# EAGLE board schematic (EAGLE 9.6.2)
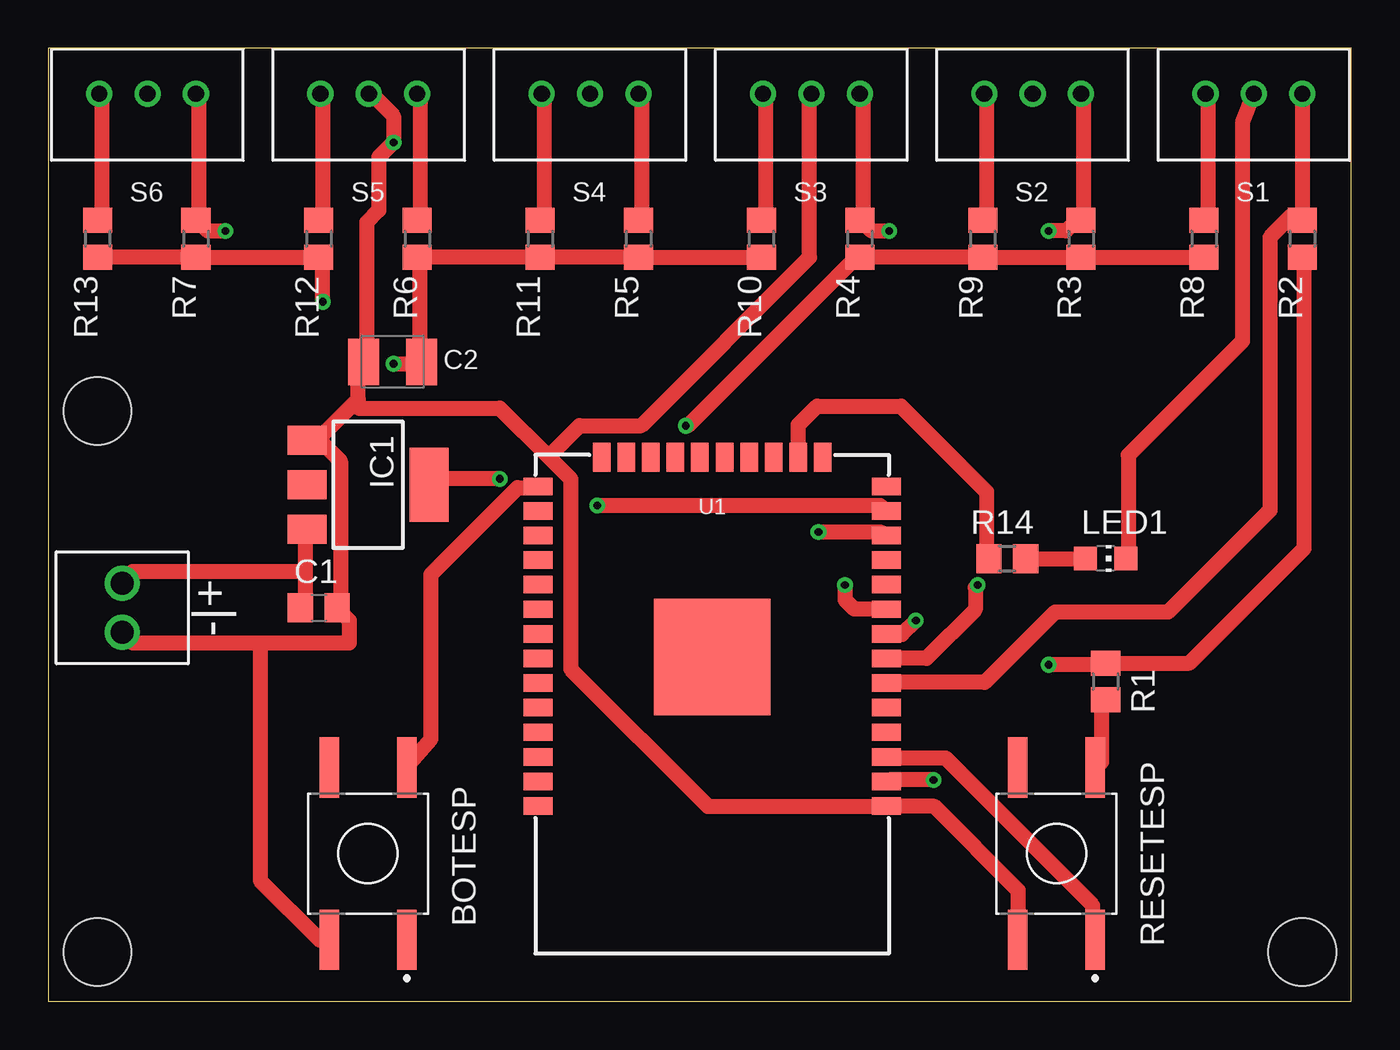
[diagram p0: board, top side]
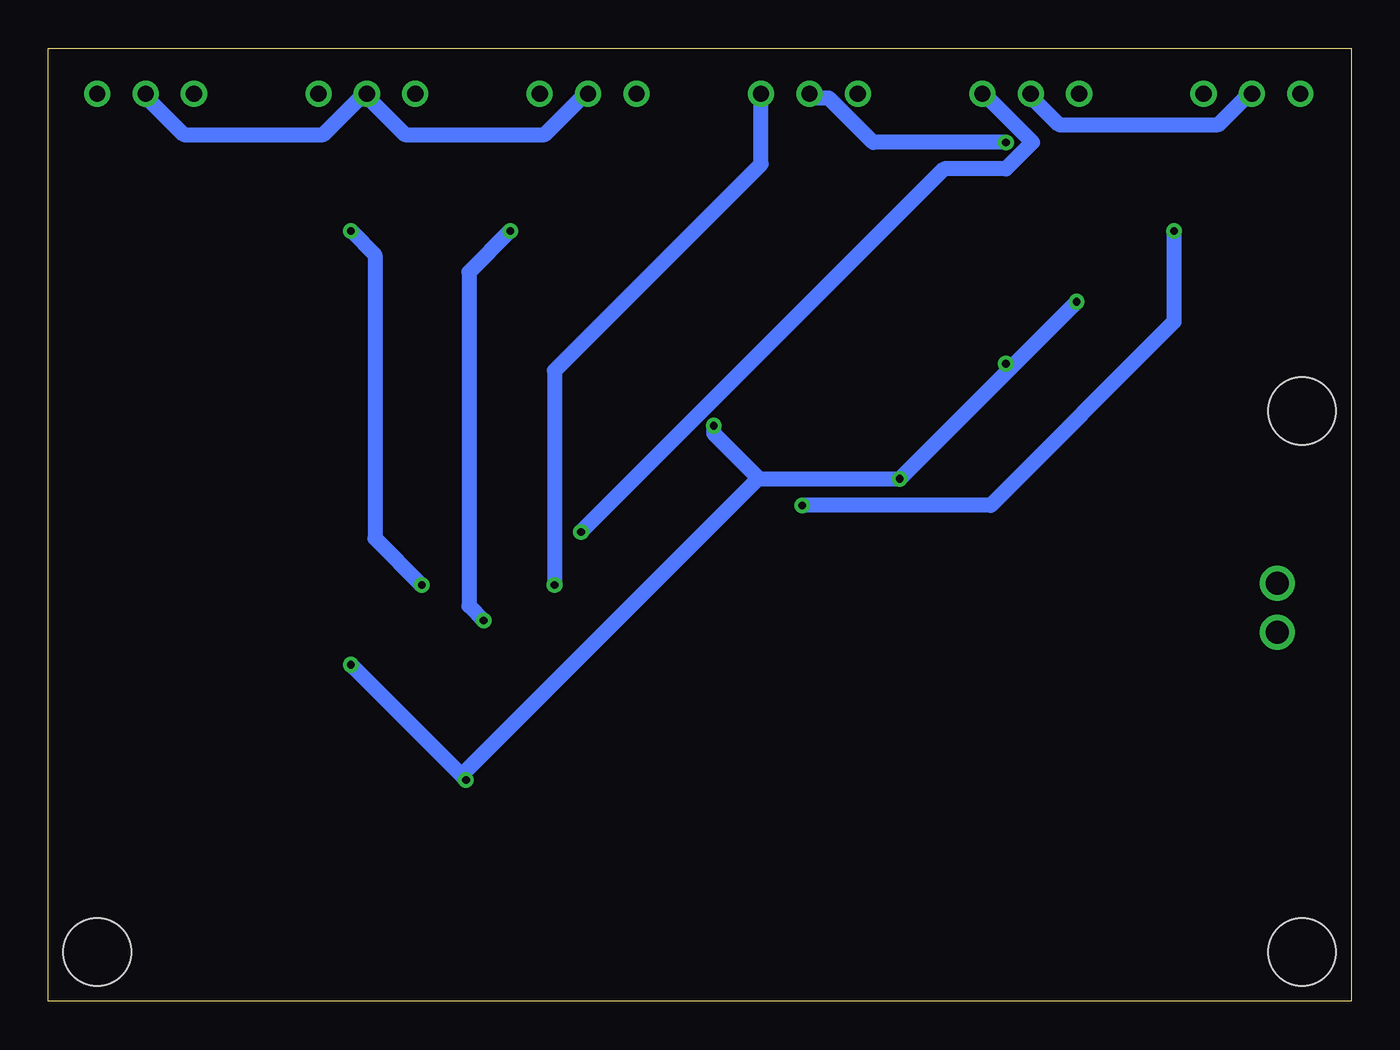
[diagram p1: board, bottom side, seen from below]

Size 67.29 x 49.2 mm. Coordinates in mm from the lower left corner, seen from the top.
Outline: 0,0 67.29,0 67.29,49.2 0,49.2 0,0
Copper layers (1*16): Top 0.035mm / dielectric 1.5mm / Bottom 0.035mm
Design rules "default *": minimum track width 30mil, minimum drill 0.4mm, track to track 6mil, track to pad 6mil, pad to pad 6mil, via to via 6mil, smd to smd 6mil, copper to edge 40mil, drill to drill 6mil, minimum pad ring 10mil, minimum via ring 8mil, stop-mask expansion 4mil, vias tented up to drill 0mil, thermal gap 10mil
Holes 3.5 mm at 2.54,2.54 64.77,2.54 2.54,30.48

## Footprints (pad centres in the part's own frame; a part is rotated, then mirrored left to right if it is on the bottom)
TERMBLK_254-2N = drill 1.2: 1 0,0; 2 2.54,0
KSC441GDCT70SHLFS = smd 3.1 x 1: 1 4.45,2; 2 -4.45,2; 3 4.45,-2; 4 -4.45,-2
C0805 = smd 1.3 x 1.5: 1 -0.95,0; 2 0.95,0
SMC_B = smd 1.6 x 2.4: + -1.5,0; - 1.5,0
SOT223 = smd 1.5 x 2: 1 -2.3,-3.15; 2 0,-3.15; 3 2.3,-3.15 | smd 3.8 x 2: 4 0,3.15
CHIP-LED0805 = smd 1.2 x 1.2: A 0,-1.05; C 0,1.05
R0805 = smd 1.3 x 1.5: 1 -0.95,0; 2 0.95,0
B3B-XH-A = drill 0.84: 1 0,0; 2 2.5,0; 3 5,0
ESP-WROOM-32 = smd 0.9 x 1.5: 1 7.7,9; 2 6.43,9; 3 5.16,9; 4 3.89,9; 5 2.62,9; 6 1.35,9; 7 0.08,9; 8 -1.19,9; 9 -2.46,9; 10 -3.73,9; 11 -5,9; 12 -6.27,9; 13 -7.54,9; 14 -8.81,9; 25 -8.81,-9; 26 -7.54,-9; 27 -6.27,-9; 28 -5,-9; 29 -3.73,-9; 30 -2.46,-9; 31 -1.19,-9; 32 0.08,-9; 33 1.35,-9; 34 2.62,-9; 35 3.89,-9; 36 5.16,-9; 37 6.43,-9; 38 7.7,-9 | smd 1.5 x 0.9: 15 -10.3,5.715; 16 -10.3,4.445; 17 -10.3,3.175; 18 -10.3,1.905; 19 -10.3,0.635; 20 -10.3,-0.635; 21 -10.3,-1.905; 22 -10.3,-3.175; 23 -10.3,-4.445; 24 -10.3,-5.715 | smd 6 x 6: GND 0,0

## Placement (x,y rotation side)
-|+  TERM-BLK-2P  [TERMBLK_254-2N]  3.81,19.05 90 top
BOTESP  KSC441GDCT70SHLFS  [KSC441GDCT70SHLFS]  16.51,7.62 270 top
C1  10uF  [C0805]  13.97,20.32 0 top
C2  22uF  [SMC_B]  17.78,33.02 180 top
IC1  LD117AS33TR  [SOT223]  16.51,26.67 270 top
LED1  [CHIP-LED0805]  54.61,22.86 270 top
R1  10K  [R0805]  54.61,16.51 270 top
R2  1k  [R0805]  64.77,39.37 270 top
R3  1k  [R0805]  53.34,39.37 270 top
R4  1k  [R0805]  41.91,39.37 270 top
R5  1k  [R0805]  30.48,39.37 270 top
R6  1k  [R0805]  19.05,39.37 270 top
R7  1k  [R0805]  7.62,39.37 270 top
R8  220  [R0805]  59.69,39.37 270 top
R9  220  [R0805]  48.26,39.37 270 top
R10  220  [R0805]  36.83,39.37 270 top
R11  220  [R0805]  25.4,39.37 270 top
R12  220  [R0805]  13.97,39.37 270 top
R13  220  [R0805]  2.54,39.37 270 top
R14  220  [R0805]  49.53,22.86 0 top
RESETESP  KSC441GDCT70SHLFS  [KSC441GDCT70SHLFS]  52.07,7.62 270 top
S1  JST-XH-3PIN  [B3B-XH-A]  64.77,46.86 180 top
S2  JST-XH-3PIN  [B3B-XH-A]  53.34,46.86 180 top
S3  JST-XH-3PIN  [B3B-XH-A]  41.91,46.86 180 top
S4  JST-XH-3PIN  [B3B-XH-A]  30.48,46.86 180 top
S5  JST-XH-3PIN  [B3B-XH-A]  19.05,46.86 180 top
S6  JST-XH-3PIN  [B3B-XH-A]  7.62,46.86 180 top
U1  ESP-WROOM-32  [ESP-WROOM-32]  34.29,17.78 270 top

## Library data of the parts
-|+ = Connector; CATEGORY: Fixed Terminal Blocks; DESCRIPTION: Fixed Terminal Blocks 2P SIDE ENTRY 2.54mm; MANUFACTURER: TE Connectivity AMP Connectors; MPN: 282834-2; OPERATING_TEMPERATURE: -40°C ~ 105°C; PART_STATUS: Active; PITCH: 0.100" (2.54mm); ROHS_COMPLIANCE: RoHS Compliant; SERIES: Buchanan; SUBCATEGORY: Terminal Blocks; TYPE: Through Hole; Screw - Rising Cage Clamp; Side wire entry, Horizontal with Board
BOTESP RESETESP = Switch; CREATED_BY: PCBLayout.com; DIGIKEY_PARTNO: CKN12187TR-ND; MANUFACTURER: C&K; MPN: KSC441G DCT 70SH LFS
C1 C2 = rcl; SPICEPREFIX: C
IC1 = v-reg
LED1 = led
R1-R14 = rcl; SPICEPREFIX: R
S1-S6 = Connector; CATEGORY: Header; DESCRIPTION: Connector Header Through Hole 3 position 0.098" (2.50mm); MANUFACTURER: JST Sales America Inc.; MPN: B3B-XH-A(LF)(SN); PART_STATUS: ACTIVE; PITCH: 0.098" (2.50mm); ROHS_COMPLIANCE: ROHS3 Compliant; SERIES: XH; SUB_CATEGORY: Rectangular Connectors; TYPE: Header, Male Pin, Board to Cable/Wire, Through Hole
U1 = esp32

## Nets
+3V3: C2.+ IC1.4 R1.1 R2.2 R3.2 R4.2 R5.2 R6.2 R7.2 R8.2 R9.2 R10.2 R11.2 R12.2 R13.2 U1.2
+9V: -|+.2 C1.1 IC1.3
BOOT: BOTESP.2 U1.25
GND: -|+.1 BOTESP.3 C1.2 C2.- IC1.1 LED1.C RESETESP.3 S1.2 S2.2 S3.2 S4.2 S5.2 S6.2 U1.1
LED: R14.1 U1.16
N$1: R8.1 S1.3
N$2: R9.1 S2.3
N$3: R10.1 S3.3
N$4: R1.2 RESETESP.2
N$5: R11.1 S4.3
N$6: R12.1 S5.3
N$7: R13.1 S6.3
N$8: LED1.A R14.2
RESET: RESETESP.1 U1.3
SENSOR1: R2.1 S1.1 U1.6
SENSOR2: R3.1 S2.1 U1.7
SENSOR3: R4.1 S3.1 U1.8
SENSOR4: R5.1 S4.1 U1.9
SENSOR5: R6.1 S5.1 U1.12
SENSOR6: R7.1 S6.1 U1.13

## Tracks (layer width: path | path; a pad name or v marks a point on that pad's centre or on a via)
+3V3  (via drill 0.4)
  Top 0.762: 19.2,38.41 19.2,33.38 C2.+ 19.2,32.92 v17.83,32.92 | R10.2 36.58,38.41 30.63,38.41 R5.2 30.18,38.41 25.6,38.41 R11.2 25.15,38.41 19.2,38.41 | 19.2,38.41 R6.2 | R8.2 59.44,38.41 53.49,38.41 R3.2 53.03,38.41 48.46,38.41 R9.2 48.01,38.41 42.06,38.41 R4.2 41.74,38.41 33.05,29.72 v32.92,29.72 | R13.2 2.74,38.41 7.32,38.41 R7.2 7.77,38.41 13.72,38.41 R12.2 14.17,38.41 v14.17,36.12 | v45.72,11.43 43.43,11.43 U1.2 | v51.66,17.37 54.41,17.37 R1.1 58.94,17.46 64.85,23.37 64.85,38.34 R2.2 | v23.32,26.98 20.12,26.98 IC1.4
  Bottom 0.762: v51.66,17.37 45.95,11.66 | 45.95,11.66 v45.72,11.43 | 30.63,26.98 v23.32,26.98 17.6,32.69 | 45.95,11.66 30.86,26.75 30.63,26.98 | 30.63,26.98 30.61,27 32.92,29.31 v32.92,29.72 | 17.6,32.69 v14.17,36.12 | v17.83,32.92 17.6,32.69
+9V
  Top 0.762: 13.26,22.2 13.26,24.23 IC1.3 | 13.26,22.2 13.26,20.57 C1.1 | 13.26,22.2 4.33,22.2 -|+.2
BOOT
  Top 0.762: U1.25 25.15,26.52 24.23,26.52 19.76,22.05 19.76,13.53 BOTESP.2
GND  (via drill 0.4)
  Top 0.762: LED1.C 55.78,22.86 55.78,28.19 61.67,34.09 61.67,45.35 S1.2 | S5.2 16.92,46.63 17.83,45.72 v17.83,44.35 17.07,43.59 17.07,40.84 16.46,40.23 16.46,33.38 C2.- 16,32.92 16,31.09 15.77,30.86 | RESETESP.3 50.09,3.19 50.09,5.74 45.77,10.06 43.43,10.06 U1.1 42.98,10.06 34.06,10.06 26.98,17.14 26.98,26.98 25.83,28.12 | 15.77,30.86 14.17,29.26 IC1.1 13.72,29.26 15.09,27.89 15.09,20.57 C1.2 15.09,20.12 15.54,19.66 15.54,18.49 10.95,18.49 | BOTESP.3 14,3.17 10.95,6.22 10.95,18.49 | 10.95,18.49 4.37,18.49 -|+.1 | 25.83,28.12 23.32,30.63 16,30.63 15.77,30.86 | 25.83,28.12 27.43,29.72 30.63,29.72 39.32,38.41 39.32,46.63 S3.2
  Bottom 0.762: S3.2 39.78,46.63 41.66,44.76 48.87,44.76 50.75,46.63 S2.2 51.21,46.63 53.09,44.76 60.3,44.76 62.18,46.63 S1.2 | S6.2 5.49,46.63 6.86,45.26 15.09,45.26 16.46,46.63 S5.2 | v17.83,44.35 24.69,44.35 26.98,46.63 27.89,46.63 S4.2
LED
  Top 0.762: U1.16 38.73,29.77 39.7,30.73 44.04,30.73 48.46,26.31 48.46,22.86 R14.1
N$1
  Top 0.762: R8.1 59.89,40.69 59.89,46.63 S1.3
N$2
  Top 0.762: R9.1 48.46,40.69 48.46,46.63 S2.3
N$3
  Top 0.762: R10.1 37.03,40.69 37.03,46.63 S3.3
N$4
  Top 0.762: R1.2 54.41,15.54 54.41,12.34 RESETESP.2
N$5
  Top 0.762: R11.1 25.6,40.69 25.6,46.63 S4.3
N$6
  Top 0.762: R12.1 14.17,40.69 14.17,46.63 S5.3
N$7
  Top 0.762: R13.1 2.74,40.69 2.74,46.63 S6.3
N$8
  Top 0.762: R14.2 LED1.A
RESET
  Top 0.762: U1.3 43.36,12.55 46.35,12.55 53.95,4.95 53.95,3.2 RESETESP.1
SENSOR1
  Top 0.762: U1.6 43.43,16.46 48.36,16.46 51.99,20.09 57.84,20.09 63.09,25.35 63.09,39.45 64.2,40.55 64.54,40.55 R2.1 64.8,40.38 64.8,46.83 S1.1
SENSOR2  (via drill 0.4)
  Top 0.762: v48.01,21.49 47.88,21.36 47.88,20.22 45.36,17.7 U1.7 | v51.66,39.78 52.58,39.78 53.03,40.23 R3.1 53.49,40.69 53.49,46.63 S2.1
  Bottom 0.762: v48.01,21.49 50.42,23.9 50.42,38.53 v51.66,39.78
SENSOR3  (via drill 0.4)
  Top 0.762: S3.1 42.06,46.63 42.06,40.69 R4.1 42.06,40.23 42.52,39.78 v43.43,39.78 | U1.8 43.31,18.95 44.09,18.95 v44.81,19.66
  Bottom 0.762: v44.81,19.66 45.57,20.42 45.57,37.64 v43.43,39.78
SENSOR4  (via drill 0.4)
  Top 0.762: U1.9 41.63,20.24 41.15,20.73 v41.15,21.49 | R5.1 30.63,40.69 30.63,46.63 S4.1
  Bottom 0.762: v41.15,21.49 41.15,32.56 30.48,43.23 S4.1
SENSOR5  (via drill 0.4)
  Top 0.762: R6.1 19.2,40.69 19.2,46.63 S5.1 | v39.78,24.23 42.98,24.23 U1.12
  Bottom 0.762: v39.78,24.23 21.03,42.98 17.83,42.98 16.46,44.35 18.75,46.63 S5.1
SENSOR6  (via drill 0.4)
  Top 0.762: S6.1 7.77,46.63 7.77,40.69 R7.1 7.77,40.23 8.23,39.78 v9.14,39.78 | v28.35,25.6 42.98,25.6 U1.13
  Bottom 0.762: v28.35,25.6 18.62,25.6 9.14,35.08 v9.14,39.78